# Altium PCB Debug IO Board.PcbDoc
Units mil, origin at the board's own origin, x right, y up, seen from the top; angles counter-clockwise.
Board outline 4000 x 2000 mil, 2 copper layers (Top Layer, Bottom Layer); 10 components, 16 nets, 61 pads, 3 vias.
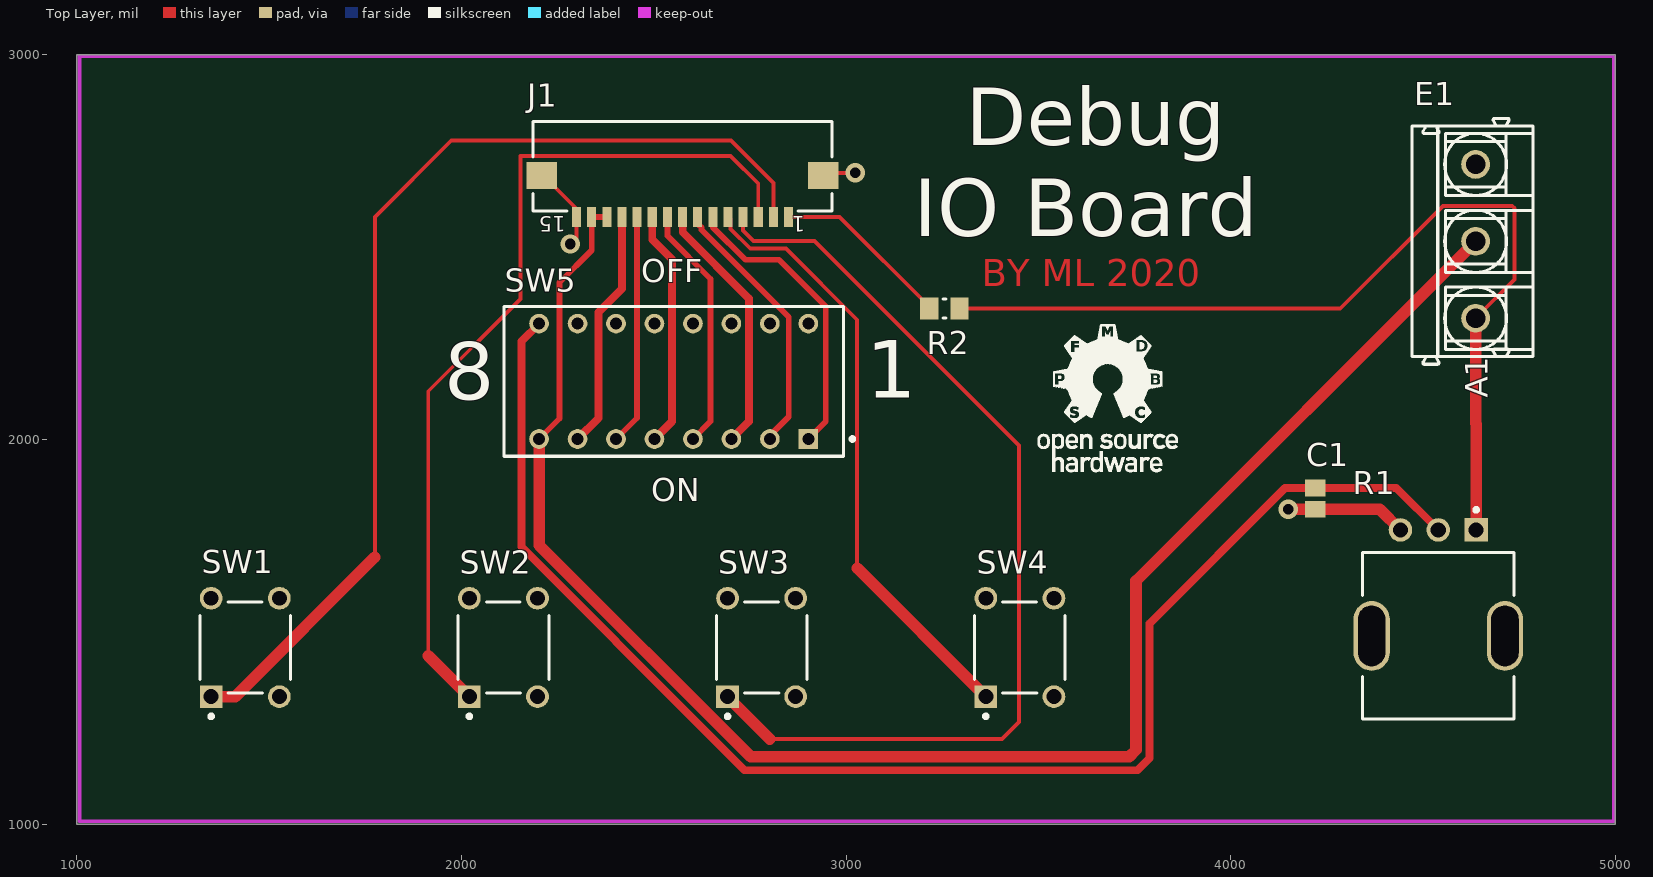
[diagram p0: Top Layer view]
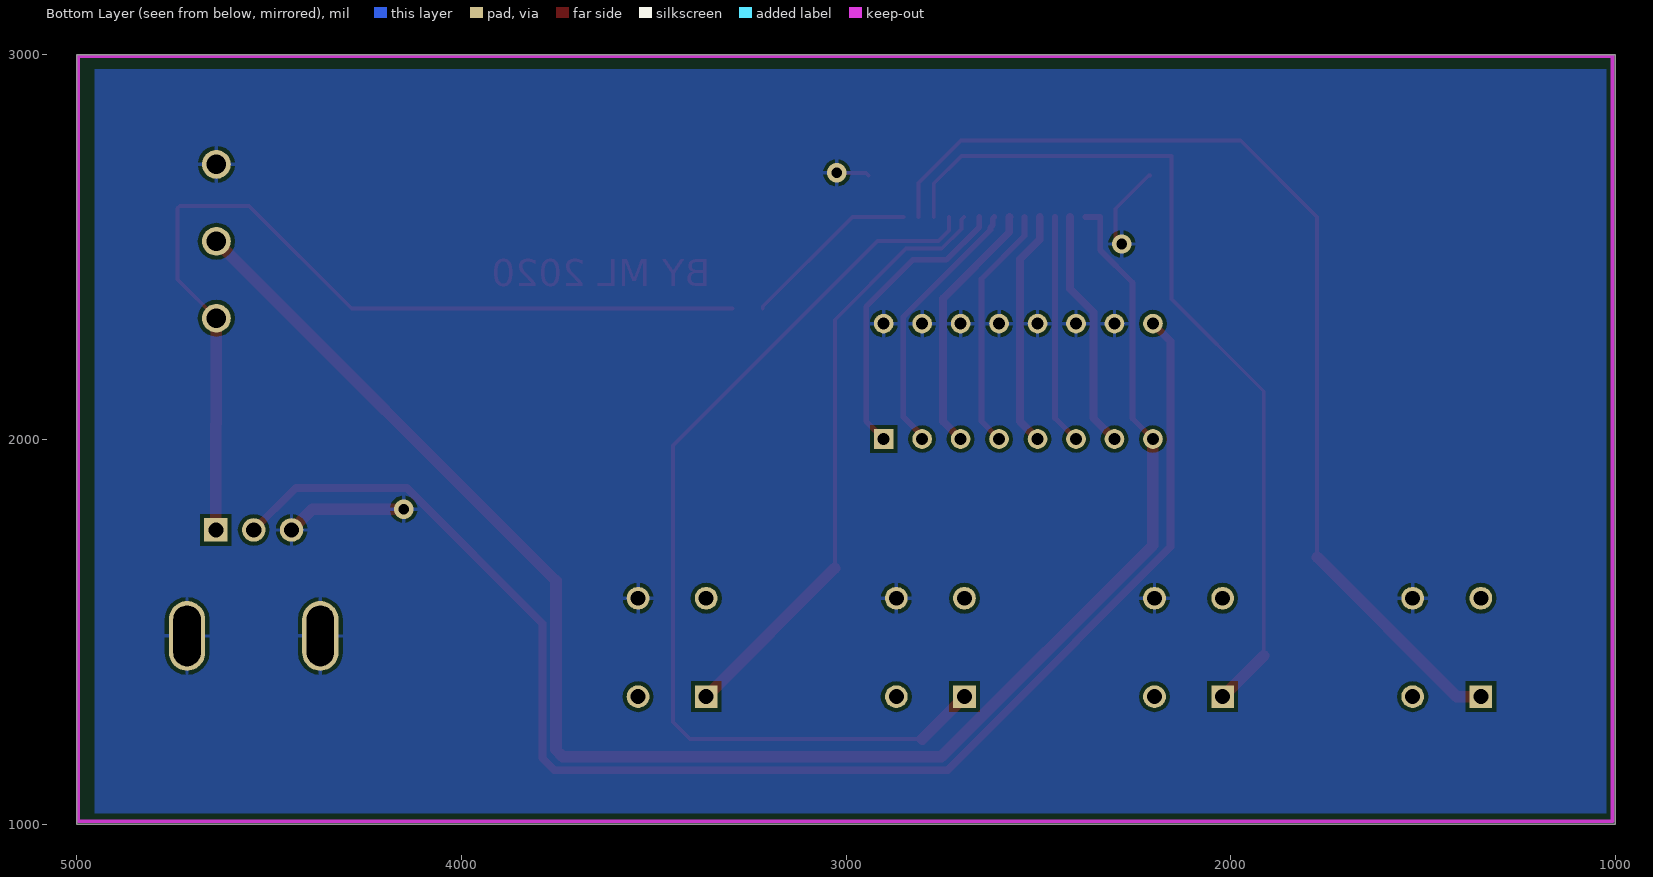
[diagram p1: Bottom Layer view, seen from below]
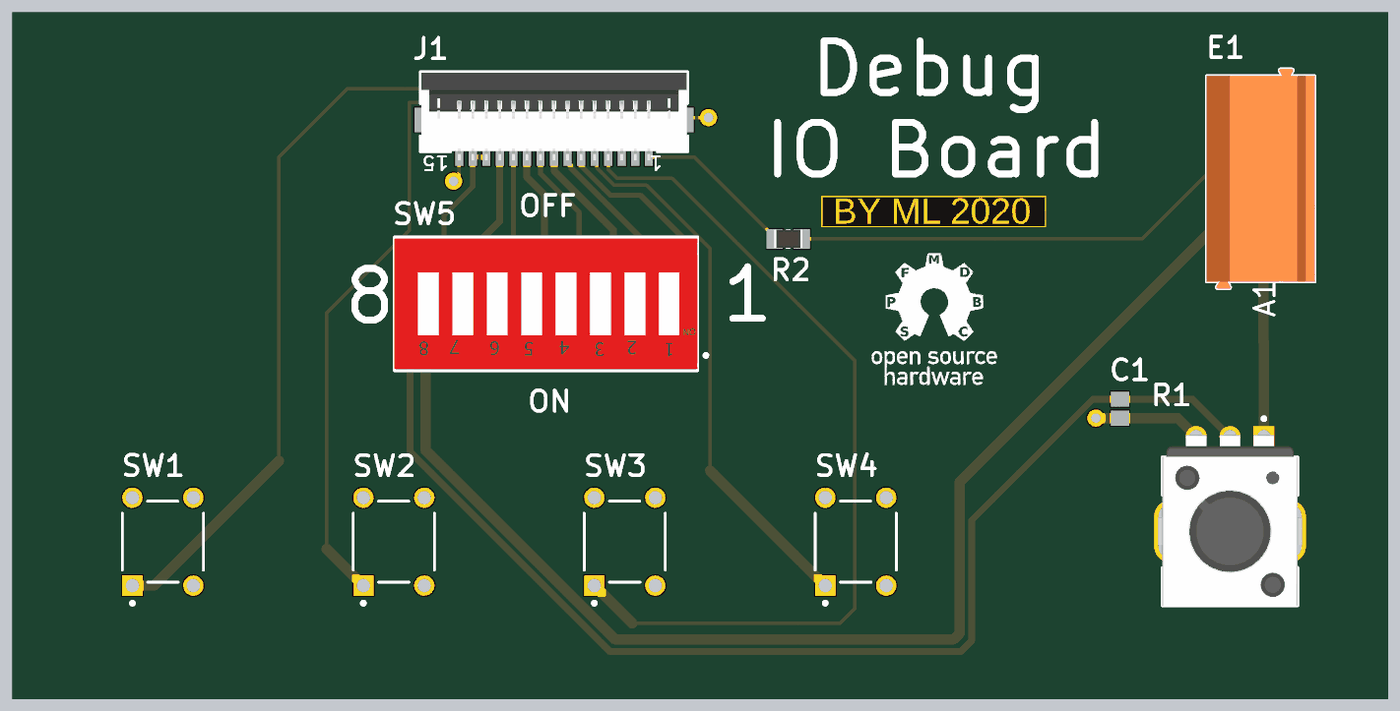
[diagram p2: 3D render of the assembled board from above, using the file's embedded part models]

## Layer stack, top to bottom
Top Solder: solder mask 0.4, Solder Resist, Dk 3.5
Top Layer: signal copper 1.4
Dielectric 1: dielectric 12.6, FR-4, Dk 4.8
Bottom Layer: signal copper 1.4
Bottom Solder: solder mask 0.4, Solder Resist, Dk 3.5

## Board outline
1000,1000 5000,1000 5000,3000 1000,3000

## Design rules (kind name [scope] priority, off if disabled: settings)
Clearance [All] p1: gap=10 ignorepadtopadclearanceinfootprint=FALSE except(0: Arc-Hole Track-Hole SMDPad-Hole THPad-Hole Via-Hole Fill-Hole Poly-Hole Region-Hole Text-Hole)
PolygonConnect [All] p1: connectstyle=Relief reliefconductorwidth=10 reliefentries=4 polygonreliefangle="90 Angle" airgapwidth=10
RoutingVias [All] p1: holewidth=28 width=50 viastyle="Through Hole" minholewidth=28 minwidth=50 maxholewidth=28 maxwidth=50
SolderMaskExpansion [All] p1: expansion=4 istentingtop=FALSE
Width [All] p1: maxlimit=100 minlimit=10 preferedwidth=10 minimp=50.000000 maximp=50.000000 favimp=50.000000
30 further rules are at their usual default settings.

## Components (designator, comment, footprint, x,y, rotation, side; value= is the part's Value field where it differs from the comment)
C1 "C0805C105K4PACTU" CAPC2013X145X50LL20T25 4220,1846 r90 top
E1 "1760500000" PM_5_08_90_03 4629.13,2515 r90 top
J1 "686115148922" 686115148922 2575,2710 r180 top
R1 "PTV09A-4020U-B103" FP-PTV09A-4-MFG 4540,1489 r180 top value=10kΩ
R2 "RC0805FR-071KL" RESC2013X60X35ML10T20 3256,2340 r0 top
SW1 "1825910-6" TECO-1825910-6_V 1438,1459 r90 top
SW2 "1825910-6" TECO-1825910-6_V 2109.33,1459 r90 top
SW3 "1825910-6" TECO-1825910-6_V 2780.67,1459 r90 top
SW4 "1825910-6" TECO-1825910-6_V 3452,1459 r90 top
SW5 "78B08ST" FP-78B08ST-MFG 2552,2151 r180 top

## Footprints (in the part's own frame and the unit in brackets; to place one, negate y for a bottom-side part, rotate by r counter-clockwise, add the part's x,y. Pads: shape width x height; smd on the part's side, far side on the other; paste and mask are expansions set on the pad)
686115148922 [mm] "ZIF Connectors, Horizontal, Bottom Contact Hinge Type, pitch 1mm, 15p"
  rect 0.6x1.3 smd: 1(-7,3.35) 2(-6,3.35) 3(-5,3.35) 4(-4,3.35) 5(-3,3.35) 6(-2,3.35) 7(-1,3.35) 8(0,3.35) 9(1,3.35) 10(2,3.35) 11(3,3.35) 12(4,3.35) 13(5,3.35) 14(6,3.35) 15(7,3.35)
  rect 2x1.8 smd: MP1(-9.3,0.6) MP2(9.3,0.6)
  silkscreen extent -9.88,-2.95 9.88,2.95, body extent -9.8,-2.9 9.8,3.6, height 2.27
CAPC2013X145X50LL20T25 [mm] "Chip Capacitor, 2-Leads, Body 2.00x1.25mm, IPC High Density"
  rect 1.1x1.35 smd: 1(-0.7,0) 2(0.7,0)
  body extent -1.1,-0.72 1.1,0.72, height 1.45
FP-78B08ST-MFG [mm]
  rect 1.3x1.3 hole 0.8 paste-1000 mask+0: 1(-8.89,3.81)
  round 1.3 hole 0.8 paste-1000 mask+0: 2(-6.35,3.81) 3(-3.81,3.81) 4(-1.27,3.81) 5(1.27,3.81) 6(3.81,3.81) 7(6.35,3.81) 8(8.89,3.81) 9(8.89,-3.81) 10(6.35,-3.81) 11(3.81,-3.81) 12(1.27,-3.81) 13(-1.27,-3.81) 14(-3.81,-3.81) 15(-6.35,-3.81) 16(-8.89,-3.81)
  silkscreen extent -11.93,-4.95 11.2,4.95, body extent -11.3,-5.05 11.3,5.05, height 0.25
FP-PTV09A-4-MFG [mm]
  rect 1.55x1.55 hole 1 paste-1000 mask+0: 1(-2.5,-7)
  round 1.55 hole 1 paste-1000 mask+0: 2(0,-7) 3(2.5,-7)
  rrect100% 2.4x4.6 hole 4 slot 1.8 at 0 deg paste-1000 mask+0: 4(-4.4,0) 5(4.4,0)
  silkscreen extent -5,-8.45 5,5.5, body extent -5.8,-7.88 5.8,5.6, height 0.25
PM_5_08_90_03 [mm] "PM 5.08/03/90 3.5"
  round 1.9 hole 1.3: A1(-5.08,-0.2) A2(0,-0.2) A3(5.08,-0.2)
  silkscreen extent -8.12,-4 8.12,4, body extent -8.12,-4 8.12,4, height 10.01
RESC2013X60X35ML10T20 [mm] "Chip Resistor, 2-Leads, Body 2.1x1.35mm, IPC Low Density"
  rect 1.2x1.45 smd: 1(-1,0) 2(1,0)
  silkscreen extent -0.1,-0.62 0.1,0.62, body extent -1.05,-0.68 1.05,0.67, height 0.6
TECO-1825910-6_V [mm] "Switch, 4-Leads, Body 5.99x5.99mm"
  rect 1.5x1.5 hole 0.99: 1(-3.25,2.25)
  round 1.5 hole 0.99: 2(3.25,2.25) 3(-3.25,-2.25) 4(3.25,-2.25)
  silkscreen extent -4.67,-3 3,3, body extent -3,-2.99 2.99,3, height 5

## Part data
C1: library part CMP-2007-01016-1, Manufacturer=Kemet, Part Number=C0805C105K4PACTU
E1: library part CMP-1559-01629-1, "OMNIMATE Signal - series PM", Colour=Orange, Manufacturer=Weidmueller, Rated_current_use_group_B_UL_1059="15 A", Rated_voltage_for_surge_voltage_class_pollution_degree_II_2="600 V", Rated_voltage_use_group_B_UL_1059="300 V", UL_94_flammability_rating=V-0, ComponentLink1Description="Manufacturer URL", ComponentLink1URL=http://www.weidmueller.com/, ComponentLink2Description="URL Link1", ComponentLink2URL=http://catalog.weidmueller.com/catalog/Start.do?localeId=en&ObjectID=1760500000, Contact_material=Cu-Leg, Contact_surface=tinned, Insulating_material="Wemid (PA)", Mounting_onto_the_PCB="Solder connection", No_of_poles=3, PackageReference=PM_5_08_90_03, Packaging=Box, PartNumber=1760500000, Pitch_inch="0,2 inch", Pitch_mm="5,08 mm", Qty="500 PCS", Revision=V1, Short_text_for_material="PM 5.08/03/90 3.5SN OR BX", Side_termination_characteristic="closed side", Solder_pin_length_mm="3,5 mm", Solid_max_H05_07_V_U="2,5 mm²", Solid_min_H05_07_V_U="0,13 mm²", Wire_cross_section_AWG_max_UL_1059="AWG 14", Wire_cross_section_AWG_min_UL_1059="AWG 26"
J1: library part CMP-1502-01518-1, "SMT ZIF Connectors Hinge Type WR-FPC, Horizontal, Bottom Contact, pitch 1 mm, 15 pins", Contact Resistance=50mOhm, Manufacturer="Wurth Elektronik", Operating Temperature=-40to105degC, Rated current=1A, Withstanding Voltage=500VAC, Working Voltage=100VAC, Contact Design=BottomContact, Datasheet URL=https://katalog.we-online.de/em/datasheet/686115148922.pdf, Manufacturer URL=http://www.we-online.de, Mounting Technology=SMT, Orientation=Horizontal, Package Reference=686115148922, Packaging=TapeandReel, Part Number=686115148922, Pin Number=15, Pitch=1mm, Publisher=WurthElektronik
R1: library part CMP-07234-000013-1, "POT 10K OHM 1/20W CARBON LINEAR", Manufacturer="Bourns Inc.", Package=PTV09A-4, Power Rating=0.05W, Resistance=10kΩ, Temperature="-10°C to +50°C", Temperature Range High=+50°C, Temperature Range Low=-10°C, Tolerance=20%, Voltage Rating=50V, Automotive=No, Category=Res, ComponentLink2Description=Datasheet, ComponentLink2URL=https://www.bourns.com/docs/product-datasheets/ptv09.pdf?sfvrsn=5e1089f1_12, Composition=Carbon, Device Class L1="Passive Components", Device Class L2=Resistors, Device Class L3="Variable Resistors and Potentiometers", Digikey Description="POT 10K OHM 1/20W CARBON LINEAR", Height=20.5mm, Lead Free=Yes, Manufacturer Part Number=PTV09A-4020U-B103, Mouser Description="Potentiometers 10K LINEAR 20%", Octopart=https://octopart.com/ptv09a-4020u-b103-bourns-1878033, RoHS=TRUE, Series=PTV09
R2: library part CMP-2100-03671-1, "Chip Resistor, 1 KOhm, +/- 1%, 125 mW, -55 to 155 degC, 0805 (2012 Metric), RoHS, Tape and Reel", Case Code (Imperial)=0805, Case Code (Metric)=2012, Manufacturer=Yageo, Max Operating Temperature=155degC, Max Power Dissipation=125mW, Min Operating Temperature=-55degC, Package Description="2-Pin Surface Mounted Device, Body 2 x 1.25 mm", Package Quantity=1, Resistance=1KOhm, Temperature Coefficient=100ppm/degreesC, Tolerance=1%, Voltage Rating=150V, Case/Package=0805, Composition=ThickFilm, Datasheet URL=http://www.yageo.com/NewPortal/yageodocoutput?fileName=/pdf/R-Chip/PYu-RC_Group_51_RoHS_L_5.pdf, Datasheet Version="Rev. 5, 10/2016", Depth=1.25mm, Height=0.024inch, Lead Free=LeadFree, Length=0.079inch, Manufacturer URL=http://www.yageo.com/, Military Standard=Not, Number of Pins=2, Number of Terminations=2, Package Reference=0805, Packaging=TapeandReel, Power Rating=125mW, REACH SVHC=Unknown, RoHSCompliant=true, Termination=SMD/SMT, Voltage Rating (DC)=150V, Width=0.049inch
SW1 SW2 SW3 SW4: library part CMP-1684-00021-1, "Tact Switch, SPST-NO, 0.05 A, -35 to 85 degC, 4-Pin THD, RoHS, Bulk", Actuator Color=Black, Contact Rating @ Voltage=0.05A@24VDC, Dielectric Strength=500VAC, Manufacturer="TE Connectivity", Maximum AC Voltage Rating=N/A, Maximum Contact Resistance=100mOhm, Maximum DC Voltage Rating=24V, Minimum Insulation Resistance=100MOhm, Operating Temperature=-35to85C, Package Description="4-Pin Through Hole Device, Body 5.99 x 5.99 mm, Pitch 6.5 mm", Package Reference=THD, Actuator Length=1.4mm, Actuator Material=PolybutyleneTerephthalate, Actuator Style=RoundButton, Base Material=N/A, Body Orientation=Straight, Bushing Type=Unthreaded, Contact Material=CopperAlloy, Contact Plating=Silver, Datasheet URL=http://www.te.com/commerce/DocumentDelivery/DDEController?Action=showdoc&DocId=Customer+Drawing%7F1825910%7FC9%7Fpdf%7FEnglish%7FENG_CD_1825910_C9.pdf%7F1825910-6, Datasheet Version="Rev. C9", Dimension=5.99x5mm, Electrical Life=100000Cycles, Family=1825910, Function=MomentaryContact, Housing Material=N/A, Illumination=N/R, Manufacturer URL=http://www.te.com, Mechanical Life=100000Cycles, Mounting=ThroughHole, Packaging=N/A, Part No=1825910-6, Pole Throw Configuration=SPST, Product Weight=N/A, RoHS=Yes, Seal Description=N/A, Seal Location=N/A, Switch Configuration=OFF(ON), Terminal Type=PCPins, Thread Size=N/R
SW5: library part CMP-31942-000004-1, "SWITCH SLIDE DIP SPST 150MA 30V", Contact Current Rating=150mA, Contact Resistance=30mΩ, Manufacturer=Grayhill, Temperature="-40°C to +85°C", Temperature Range High=+85°C, Temperature Range Low=-40°C, Voltage Rating Dc=30V, Automotive=No, Category=Switch, ComponentLink2Description=Datasheet, ComponentLink2URL=http://www.grayhill.com/assets/1/7/DIP_Series_78_SPST-4PST.pdf#bookmark=id.nagx8c1orts0, Device Class L1=Electromechanical, Device Class L2=Switches, Device Class L3="DIP Switches", Digikey Description="SWITCH SLIDE DIP SPST 150MA 30V", Electromechanical Life=2000Cycles, Height=8.05mm, Lead Free=Yes, Manufacturer Part Number=78B08ST, Mount="Through Hole", Mouser Description="DIP Switches / SIP Switches DIP Switch SPST 8 Pos Tape Seal", Number of Circuits=8, Octopart=https://octopart.com/78b08st-grayhill-913939, Package=78B08ST, RoHS=TRUE, Standoff Height=0.46mm, Throw Configuration=SPST

## Via types
v1: diameter 50, hole 28, Top Layer to Bottom Layer, 3 vias

## Nets (pads, with @x,y where several pads share a name; then routed paths per layer and width w, separated by ;. In a path a pad name is that pad's centre, name@x,y a point inside that pad or via, vN(x,y) a via of type N, cw(c..) or ccw(c..) an arc to the next point about the centre after c; other vN are vias at no path point)
+3V3: J1.1 R2.1 | length 467.6
  Top Layer w10: J1.1 2983.44,2578.11 3216.63,2344.92 R2.1
AN_INT: C1.2 R1.2 SW5.9 | length 3778
  Top Layer w20: SW5.9 2156.41,2255.41 2156.41,1721.09 2402,1475.5 2402,1474 2736,1140 3757.92,1140 3789,1171.08 3789,1521.08 4141.48,1873.56 C1.2 4431.03,1873.56 R1.2
ANALOG_IN: E1.A2 J1.13 J1.14 SW5.8 | length 4424.4
  Top Layer w15: SW5.8 2254.96,2053.96 2254.96,2407.96 2338.78,2491.78 J1.14 J1.13
  Top Layer w30: SW5.8 2202,1725 2752,1175 3736.43,1175 3754,1192.57 3754,1632 E1.A2
DIP1: J1.6 SW5.1 | length 768.9
  Top Layer w15: J1.6 2653.74,2551.8 2738.62,2466.92 2825.96,2466.92 2947.59,2345.28 2947.59,2046.59 SW5.1
DIP2: J1.7 SW5.2 | length 695.7
  Top Layer w15: J1.7 2618.68,2573.8 2618.68,2556.98 2624.43,2551.23 2624.43,2545.27 2851.36,2318.34 2851.36,2059.06 2802,2009.7 SW5.2
DIP3: J1.8 SW5.3 | length 667.5
  Top Layer w20: J1.8 2575.36,2577.75 2575.36,2538.64 2747.59,2366.41 2747.59,2046.59 SW5.3
DIP4: J1.9 SW5.4 | length 642.7
  Top Layer w15: J1.9 2535.63,2529.37 2648,2417 2648,2047 SW5.4
DIP5: J1.10 SW5.5 | length 617.3
  Top Layer w20: J1.10 2496.26,2519.74 2547.59,2468.41 2547.59,2046.59 SW5.5
DIP6: J1.11 SW5.6 | length 599.8
  Top Layer w15: SW5.6 2456.89,2055.89 J1.11
DIP7: J1.12 SW5.7 | length 625
  Top Layer w20: SW5.7 2356.41,2055.41 2356.41,2330.41 2417.52,2391.52 J1.12
GND: C1.1 E1.A3 J1.15 J1.MP1 J1.MP2 R1.3 R1.4 R1.5 SW1.4 SW2.4 SW3.4 SW4.4 SW5.10 SW5.11 SW5.12 SW5.13 SW5.14 SW5.15 SW5.16 | length 624.5
  Top Layer w10: J1.MP2 2212.8,2686.38 2299.41,2599.76 J1.15 2299.41,2524.41 v1(2283,2508) ; J1.MP1 2947.76,2693 v1(3024,2693)
  Top Layer w30: v1(4150,1818.44) C1.1 4387.72,1818.44 R1.3
NetE1_A1: E1.A1 R1.1 R2.2 | length 2434.6
  Top Layer w10: R2.2 4285,2340 4552,2607 4732.14,2607 4738,2601.14 4738,2416 E1.A1
  Top Layer w30: E1.A1 4637,2041.43 4638.43,2040 R1.1
PB1: J1.2 SW1.1 | length 2712.9
  Top Layer w10: 1775,1694 1775,2578 1973.81,2776.81 2701.41,2776.81 2811.22,2667 J1.2
  Top Layer w30: SW1.1 1412.05,1331.05 1775,1694
PB2: J1.3 SW2.1 | length 2283.9
  Top Layer w10: 1914,1437.8 1914,2125 2154,2365 2154,2736.81 2700.04,2736.81 2771.85,2665 J1.3
  Top Layer w30: 1914,1437.8 SW2.1
PB3: J1.4 SW3.1 | length 2525
  Top Layer w10: J1.4 2732.48,2542.8 2759.28,2516 2918,2516 3450,1984 3450,1265 3406,1221 2802.13,1221
  Top Layer w30: SW3.1 2802.13,1221
PB4: J1.5 SW4.1 | length 1579.2
  Top Layer w10: J1.5 2699.92,2571.3 2699.92,2547.08 2751,2496 2844,2496 3029,2311 3029,1665.47
  Top Layer w30: 3029,1665.47 SW4.1
pads on no net: SW1.2 SW1.3 SW2.2 SW2.3 SW3.2 SW3.3 SW4.2 SW4.3

## Polygon pours and split planes (outlines as drawn)
GND on Bottom Layer "GND_L02_P000" (solid, pour order 0): 1024,1028 4953,1028 4953,2963 1024,2963

## Keep-outs
Keep-Out Layer:
  lines w10: 1007,1007 1007,2997 4996,2997 4996,1007 1007,1007

## Other copper
Top Layer:
  text "BY ML 2020" at 3353,2375 h120

## Silkscreen, mask and mechanical layers (free items; w line width, h text height)
Top Overlay:
  drawing of 22 lines, arcs and shapes, not listed
  text "Debug" at 3311,2764.98 h150
  text "IO Board" at 3176,2528 h150
  text "OFF" at 2467,2408 h60
  text "1" at 3053,2108 h150
  text "8" at 1955,2103 h150
  text "ON" at 2493,1839 h60
Top Solder:
  rectangle: 3352,2374 4005,2466

## Text inside footprints (layer, text, board x,y; h text height)
E1: Top Overlay "A1" at 4668.3,2107.84 h59.06 r90
J1: Top Overlay "1" at 2893.9,2580.08 h40 r180; Top Overlay "15" at 2271.85,2580.08 h40 r180